# Allegro board design3 - Copy.brd
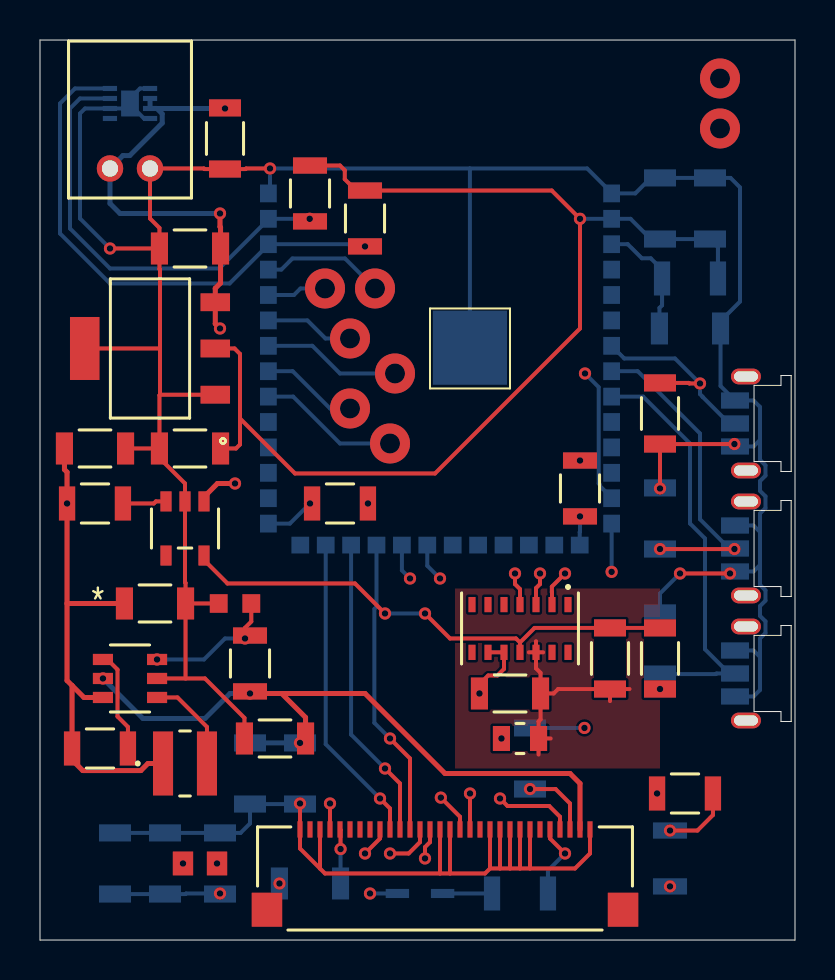
[diagram p0: board, top side]
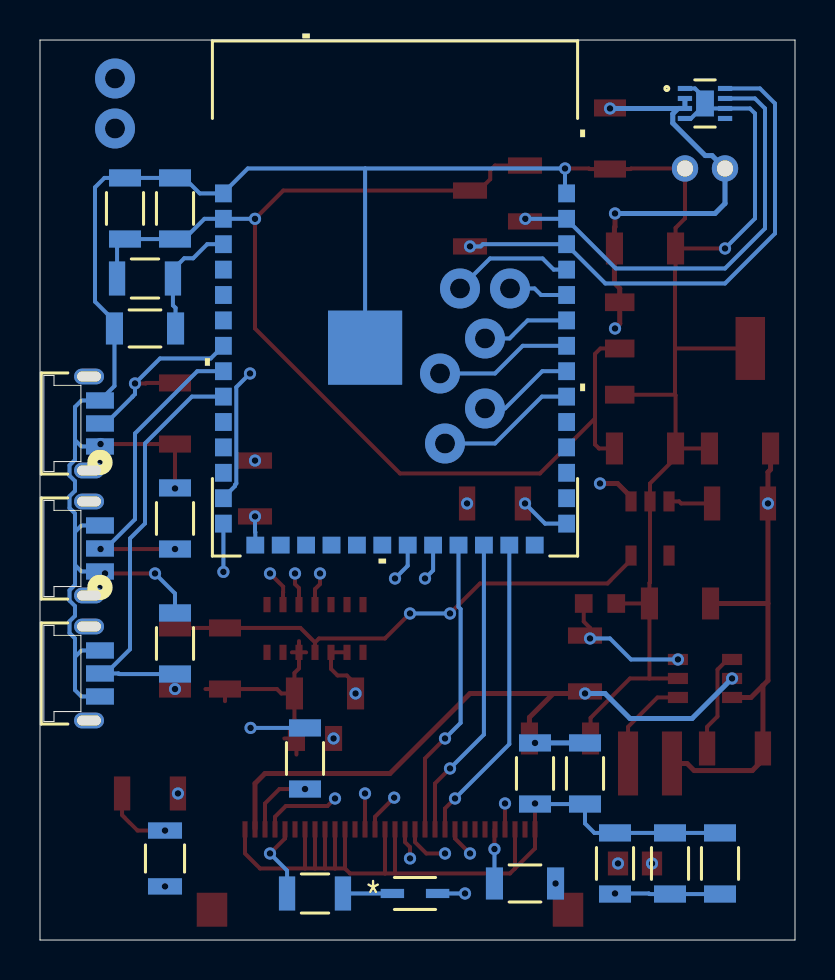
[diagram p1: board, bottom side, seen from below]

Outline 37.75 x 45 mm; copper layers: TOP, SIGNAL1, SIGNAL2, BOTTOM. Coordinates in mm from the lower left corner of the outline.
Outline path: 0,45 0,0 37.75,0 37.75,45 0,45

## Design rules (mm)
constraint set DEFAULT: pair gap 0.2
nets with their own width: min track width 0.25; nets 3.7V LI-PO 13V

## Placement (name value [footprint] x y rotation side)
C1  10uF  [CAP_CL31_SAM]  7.5 34.58 0 top
C2  10uF  [CAP_CL31_SAM]  7.5 24.58 0 top
C3  10uF  [CAP_CL31_SAM]  31 36.58 270 bottom
C4  0.1uF  [CAP_CL31_SAM]  33.5 36.58 270 bottom
C5  0.1uF  [CAP_CL31_SAM]  32.5 30.58 180 bottom
C6  10uF  [CAP_CL31_SAM]  23.5 12.33 180 top
C7  10uF  [CAP_CL31_SAM]  28.5 14.08 90 top
C8  0.01uF  [CAP_CL21_SAM]  24 10.08 180 top
C9  10uF  [CAP_CL31_SAM]  9.25 40.08 90 top
C10  10uF  [CAP_CL31_SAM]  5.75 16.83 180 top
C11  22uF  [CAP_CL31_SAM]  11.75 10.08 0 top
C12  10uF  [CAP_CL31_SAM]  10.5 8.33 90 bottom
C13  4.7uF  [CAP_CL31_SAM]  24.5 9.08 90 bottom
C14  1uF  [CAP_CL31_SAM]  9 3.83 90 bottom
C15  0.1uF  [CAP_CL31_SAM]  13 8.33 90 bottom
C16  1uF  [CAP_CL31_SAM]  13.5 2.83 0 bottom
C17  0.1uF  [CAP_CL31_SAM]  6.25 3.83 270 bottom
C18  4.7uF  [CAP_CL31_SAM]  3.75 3.83 90 bottom
C19  0.1uF  [CAP_CL31_SAM]  31 21.08 270 bottom
C20  0.1uF  [CAP_CL31_SAM]  31 26.33 90 top
C21  0.1uF  [CAP_CL31_SAM]  31 14.83 270 bottom
C22  1uF  [CAP_CL31_SAM]  2.75 24.58 0 top
C23  1uF  [CAP_CL31_SAM]  31 14.08 270 top
D1  1N4148WX-TP  [CR_SOD323_MCC]  19 2.33 180 bottom
J1  S2B-PH-K-S  [CONN_S2B-PH-K-S_JST]  5.5 38.58 180 top
J2  XF2M-3015-1A  [CON30_1X30_DRB_XF2C_TYC]  20.25 3.08 180 top
L1  22uH  [IND_WE-TPC_SMT_2828_WRE]  7.25 8.83 0 top
R1  10k  [RES_RC1206_YAG]  27 22.58 90 top
R2  10k  [RES_RC1206_YAG]  15 21.83 180 top
R3  10k  [RES_RC1206_YAG]  32.5 33.08 180 bottom
R4  10k  [RES_RC1206_YAG]  2.75 21.83 0 top
R5  1k  [RES_RC1206_YAG]  13.5 37.33 270 top
R6  1k  [RES_RC1206_YAG]  16.25 36.08 270 top
R9  10k  [RES_RC1206_YAG]  31.5 4.08 270 bottom
R10  10k  [RES_RC1206_YAG]  32.25 7.33 180 top
R11  10k  [RES_RC1206_YAG]  3 9.58 180 top
R12  10k 0.1%  [RES_RC1206_YAG]  10.5 13.83 90 top
R13  156 0.1%  [RESC1608X55N]  9.75 16.83 180 top
R14  50 0.1% 0.4W  [RES_RC1206_YAG]  24 2.33 180 bottom
R15  560k 1%  [RC0805N_YAG]  8 3.83 180 top
SW1  TL4105AF160QG  [TL4105AF160QG_EWI]  36.25 25.83 270 bottom
SW2  TL4105AF160QG  [TL4105AF160QG_EWI]  36.25 19.58 270 bottom
SW3  TL4105AF160QG  [TL4105AF160QG_EWI]  36.25 13.33 270 bottom
U1  ESP32-S3-WROOM-1-N8  [ESP32-S3-WROOM-1-N8_EXP]  20 32.08 180 bottom
U2  SPX1117M3-L-3-3/TR  [SOT223-3_MXL]  5.5 29.58 90 top
U3  MAX30102EFD+T  [21-1048_F143A51_MXM]  24 15.58 270 top
U4  AP2112K-1.8TRG1  [AP2112K-1P8TRG1_DIO]  7.25 20.58 270 top
U5  MAX17048G+T10  [21-0168E_T822-3_MXM]  4.5 41.83 180 bottom
U6  AP3036BKTR-G1  [SOIC6_AP3036BKTR-G1_DIO]  4.5 13.08 0 top

## Library data of the parts
C1-C5 C7-C20 C22 C23 = C
C6 C21 = C: User Part Number: PN; Tolerance: TOL
D1 = BAS16/SOT_0
J1 = SIPSOC-3_2
J2 = SIPSOC-32_3
L1 = L
R1 R3-R6 R9 R11-R14 = R
R2 R10 R15 = R: User Part Number: PN; Tolerance: TOL
SW1-SW3 = TL4105AF160QG
U1 = ESP32-S3-WROOM-1-N8
U2 = CSLSOC-4_3
U3 = DIPSOC-7x2_0
U4 = DIPSOC-3x2_0
U5 = ZIFSOC-7x2_0
U6 = DIPSOC-3x2_4

## Footprints (pads in the part's own frame, mm; a bottom-side part is the same pattern mirrored in y, then rotated)
21-0168E_T822-3_MXM
  rect 0.711x0.254 smd: 1(-1.003,0.75) 2(-1.003,0.25) 3(-1.003,-0.25) 4(-1.003,-0.75) 5(1.003,-0.75) 6(1.003,-0.25) 7(1.003,0.25) 8(1.003,0.75)
  rect 0.889x1.295 smd: 9(0,0)
21-1048_F143A51_MXM
  rect 0.762x0.356 smd: 1(-1.194,2.4) 2(-1.194,1.6) 3(-1.194,0.8) 4(-1.194,0) 5(-1.194,-0.8) 6(-1.194,-1.6) 7(-1.194,-2.4) 8(1.194,-2.4) 9(1.194,-1.6) 10(1.194,-0.8) 11(1.194,0) 12(1.194,0.8) 13(1.194,1.6) 14(1.194,2.4)
AP2112K-1P8TRG1_DIO
  rect 1.005x0.559 smd: 1(-1.353,0.95) 2(-1.353,0) 3(-1.353,-0.95) 4(1.353,-0.95) 5(1.353,0.95)
CAP_CL21_SAM
  rect 0.856x1.25 smd: 1(-0.928,0) 2(0.928,0)
CAP_CL31_SAM
  rect 0.856x1.6 smd: 1(-1.528,0) 2(1.528,0)
CON30_1X30_DRB_XF2C_TYC
  rect 1.524x1.702 smd: (-8.903,1.562) (8.903,1.562)
  rect 0.254x0.813 smd: 1(-7.25,-2.451) 2(-6.75,-2.451) 3(-6.25,-2.451) 4(-5.75,-2.451) 5(-5.25,-2.451) 6(-4.75,-2.451) 7(-4.25,-2.451) 8(-3.75,-2.451) 9(-3.25,-2.451) 10(-2.75,-2.451) 11(-2.25,-2.451) 12(-1.75,-2.451) 13(-1.25,-2.451) 14(-0.75,-2.451) 15(-0.25,-2.451) 16(0.25,-2.451) 17(0.75,-2.451) 18(1.25,-2.451) 19(1.75,-2.451) 20(2.25,-2.451) 21(2.75,-2.451) 22(3.25,-2.451) 23(3.75,-2.451) 24(4.25,-2.451) 25(4.75,-2.451) 26(5.25,-2.451) 27(5.75,-2.451) 28(6.25,-2.451) 29(6.75,-2.451) 30(7.25,-2.451)
CONN_S2B-PH-K-S_JST
  round 1.321 hole 0.813: 1(0,0) 2(2,0)
CR_SOD323_MCC
  rect 1.168x0.457 smd: 1(-1.13,0) 2(1.13,0)
ESP32-S3-WROOM-1-N8_EXP
  rect 0.838x0.889 smd: 1(-8.581,5.254) 2(-8.581,3.984) 3(-8.581,2.714) 4(-8.581,1.444) 5(-8.581,0.174) 6(-8.581,-1.096) 7(-8.581,-2.366) 8(-8.581,-3.636) 9(-8.581,-4.906) 10(-8.581,-6.176) 11(-8.581,-7.446) 12(-8.581,-8.716) 13(-8.581,-9.986) 14(-8.581,-11.256) 27(8.581,-11.256) 28(8.581,-9.986) 29(8.581,-8.716) 30(8.581,-7.446) 31(8.581,-6.176) 32(8.581,-4.906) 33(8.581,-3.636) 34(8.581,-2.366) 35(8.581,-1.096) 36(8.581,0.174) 37(8.581,1.444) 38(8.581,2.714) 39(8.581,3.984) 40(8.581,5.254)
  rect 0.889x0.838 smd: 15(-6.985,-12.331) 16(-5.715,-12.331) 17(-4.445,-12.331) 18(-3.175,-12.331) 19(-1.905,-12.331) 20(-0.635,-12.331) 21(0.635,-12.331) 22(1.905,-12.331) 23(3.175,-12.331) 24(4.445,-12.331) 25(5.715,-12.331) 26(6.985,-12.331)
  rect 3.708x3.708 smd: 41(-1.496,-2.461)
IND_WE-TPC_SMT_2828_WRE
  rect 1.003x3.2 smd: 1(-1.099,0) 2(1.099,0)
RC0805N_YAG
  rect 1.016x1.194 smd: 1(-0.851,0) 2(0.851,0)
RES_RC1206_YAG
  rect 0.813x1.702 smd: 1(-1.397,0) 2(1.397,0)
RESC1608X55N
  rect 0.89x0.93 smd: 1(-0.814,0) 2(0.814,0)
SOIC6_AP3036BKTR-G1_DIO
  rect 1.005x0.559 smd: 1(-1.353,0.95) 2(-1.353,0) 3(-1.353,-0.95) 4(1.353,-0.95) 5(1.353,0) 6(1.353,0.95)
SOT223-3_MXL
  rect 0.889x1.473 smd: 1(-2.311,-3.264) 2(0,-3.264) 3(2.311,-3.264)
  rect 3.15x1.473 smd: 4(0,3.264)
TL4105AF160QG_EWI
  round 0.406 hole 0.406 unplated: (-2.349,0.61) (-2.349,1.295) (2.349,0.61) (2.349,1.295)
  oval 0.787x1.499 hole 0.5x1.2: (-2.349,0.953) (2.349,0.953)
  rect 0.813x1.397 smd: 1(-1.149,1.499) 2(0,1.499) 3(1.149,1.499)

## Nets
1.8V: C7.2 C23.1 U3.11 U4.5
3.3V: C2.2 C3.2 C4.2 C6.2 C14.1 C17.2 C18.1 J2.4 J2.27 R3.1 R5.1 R6.1 U1.2 U2.2 U3.9 U3.10
3.7V LI-PO: C1.2 C9.2 C10.2 C22.1 J1.2 L1.1 R4.1 R11.2 U2.3 U4.1 U5.2 U5.3 U6.3
13V: C11.2 C12.2 C15.2 J2.2 R12.1 U6.2
AGND: C6.1 C7.1 C8.1 U3.12
GND: C1.1 C2.1 C3.1 C4.1 C5.1 C8.2 C9.1 C10.1 C11.1 C12.1 C13.2 C14.2 C15.1 C16.1 C17.1 C18.2 C19.1 C20.1 C21.1 C22.2 C23.2 D1.2(CATHODE) J1.1 J2.1 J2.7 J2.8 J2.9 J2.10 J2.11 J2.15 J2.16 J2.28 J2.30 R1.2 R2.1 R9.1 R10.1 R13.2 R15.2 SW1.1 SW1.3 SW2.1 SW2.3 SW3.1 SW3.3 U1.1 U1.40 U1.41 U2.1 U2.4 U3.4 U4.2 U5.1 U5.4 U5.6 U5.9 U6.5
BUTTON_1: C20.2 SW1.2 U1.7
BUTTON_2: C19.2 SW2.2 U1.8
BUTTON_3: C21.2 SW3.2 U1.9
DISP_CS: J2.19 U1.23
DISP_DC: J2.20 U1.24
DISP_MOSI: J2.13 U1.21
DISP_RES: J2.21 U1.25
DISP_SCK: J2.14 U1.22
ESP32_EN: C5.2 R3.2 U1.3
I2C_SCL: R5.2 U1.39 U3.2 U5.7
I2C_SDA: R6.2 U1.38 U3.3 U5.8
RX: U1.36
TCK: U1.32
TDI: U1.34
TDO: U1.33
TMS: U1.35
TX: U1.37(TXD0)
USB D+: U1.14
USB D-: U1.13
N00421: R2.2 U1.27
N01223: R1.1 U1.15
N04908: R4.2 U4.3
N15026: J2.18 R9.2
N15734: J2.17 R10.2
N18724: L1.2 U6.4
N20621: R12.2 R13.1 U6.6
N22987: C13.1 J2.3
N26816: J2.5 R14.1
N27245: J2.22 R15.1
N27840: C16.2 J2.26
N158330: R11.1 U6.1
N266210: D1.1 R14.2

Pads without a net: J2 6 12 23 24 25 29; U1 4 5 6 10 11 12 16 17 18 19 20 26 28 29 30 31; U3 1 5 6 7 8 13 14; U4 4; U5 5

## Via types
v1: diameter 0.61, hole 0.33, TOP to BOTTOM, 61 vias
v2: diameter 2, hole 1, TOP to BOTTOM, 8 vias

## Routing (per net, layer and track width the routed paths; a pad name or vN(x,y) marks a point on that pad's centre or on a via; arc(x,y) is an arc through that point)
1.8V: length 25.5
  TOP w0.2: v1(19.25,16.33) 20.5,15.08 23.8,15.08 24,14.88 ; v1(17.25,16.33) 15.75,17.83 9.37,17.83 8.2,19 U4.5 ; C23.1 C7.2 24.73,15.6 24,14.88 ; U3.11 24,14.88
  BOTTOM w0.2: v1(17.25,16.33) v1(19.25,16.33)
3.3V: length 100.3
  TOP w0.2: v1(21.97,12.33) 21.97,12.79 22.41,13.23 22.87,13.23 23.2,13.55 U3.10 U3.9 ; J2.4 26,6.16 25.46,6.7 23.38,6.7 v1(23,7.08) ; 10,26.08 10,29.3 9.73,29.58 U2.2 ; 10,26.08 12.75,23.33 19.75,23.33 27,30.58 v1(27,36.06) 25.59,37.47 R6.1 15.81,37.47 15.24,38.04 15.24,38.48 15,38.72 R5.1 ; 10,26.08 10,24.78 9.8,24.58 C2.2 ; J2.27 v1(14.5,6.83)
  SIGNAL1 w0.2: v1(14.5,6.83) 15.5,6.83 16,6.33 22.25,6.33 v1(23,7.08)
  SIGNAL2 w0.2: v1(9,2.33) 10,2.33 v1(14.5,6.83) 14.5,11.08 15.75,12.33 v1(21.97,12.33)
  BOTTOM w0.2: C18.1 C17.2 7.28,2.3 7.3,2.33 v1(9,2.33) ; v1(27,36.06) U1.2 29.53,36.06 30.54,35.05 C3.2 C4.2 33.9,34.65 R3.1
3.7V LI-PO: length 66.6
  TOP w0.25: U6.3 2.2,12.13 1.6,12.72 ; U4.1 8.2,22.15 8.87,22.83 v1(9.75,22.83) ; L1.1 5.4,8.83 5.04,8.47 2.14,8.47 1.6,9.01 R11.2 1.6,12.72 ; C10.2 1.35,16.83 ; 1.35,16.83 v1(1.35,21.83) 1.35,23.39 1.22,23.52 C22.1 ; 1.35,16.83 1.35,12.97 1.6,12.72 ; v1(9,30.58) 8.76,30.81 U2.3 8.76,32.58 9.03,32.85 C1.2 9.03,35.63 9,35.66 v1(9,36.33)
  SIGNAL1 w0.25: v1(9,30.58) 10.14,29.43 10.14,23.22 v1(9.75,22.83) 3.75,22.83 2.75,21.83 v1(1.35,21.83)
  BOTTOM w0.25: 5.84,41.58 v1(9.25,41.58) ; 5.84,41.58 6.11,41.31 6.11,40.84 4.49,39.22 4.15,39.22 J1.2 3.5,36.83 4,36.33 v1(9,36.33) ; 5.84,41.58 U5.3 U5.2
13V: length 34.6
  TOP w0.25: 12.08,12.33 16.25,12.33 20.25,8.33 26.5,8.33 27,7.83 J2.2 ; 12.08,12.33 13.28,11.13 C11.2 ; 12.08,12.33 v1(10.5,12.33)
  BOTTOM w0.25: v1(3.15,13.08) 5.15,11.08 8.25,11.08 9.5,12.33 v1(10.5,12.33) ; v1(13,9.85) C12.2
AGND: length 12.3
  TOP w0.2: 28.5,11.94 C7.1 ; C7.1 25.9,12.55 25.68,12.33 C6.1 ; C7.1 29.48,12.55 ; C8.1 24.93,10.93 25.03,11.03 C6.1 ; C8.1 25.53,10.08 ; C8.1 24.93,9.27 ; U3.12 25.16,14.38 ; U3.12 24.8,14.94 ; U3.12 24.44,14.38 ; U3.12 24.8,13.58 25.03,13.35 C6.1
GND: length 202.1
  TOP w0.2: 24,3.58 24.5,3.58 ; 24,3.58 J2.8 ; 24,3.58 23.5,3.58 ; 24.5,3.58 26.75,3.58 27.5,4.33 J2.1 ; 24.5,3.58 J2.7 ; 20.5,3.33 22.25,3.33 22.5,3.58 ; 20.5,3.33 J2.15 ; 20.5,3.33 20,3.33 ; 23.5,3.58 23,3.58 ; 23.5,3.58 J2.9 ; 23,3.58 J2.10 ; 23,3.58 22.5,3.58 ; 22.5,3.58 J2.11 ; C11.1 10.22,11.1 8.25,13.08 7.28,13.08 ; C10.1 7.28,13.08 ; C10.1 R13.2 ; C10.1 7.28,17.85 7.25,17.88 U4.2 7.25,22.83 5.97,24.1 C2.1 ; 7.28,13.08 U6.5 ; v1(31,22.58) C20.1 v1(34.72,24.8) ; v1(13,6.83) J2.30 13,4.58 14,3.58 ; v1(23.75,18.33) 23.75,17.79 24,17.54 U3.4 ; C2.1 C22.2 ; C2.1 5.97,27.24 6,27.26 ; 6,27.26 U2.1 ; 6,27.26 6,29.58 ; v1(3.5,34.58) C1.1 ; C1.1 5.97,35.6 5.5,36.08 J1.1 8.2,38.58 8.22,38.55 C9.1 10.28,38.55 10.3,38.58 v1(11.5,38.58) ; C1.1 5.97,33.55 6,33.52 6,29.58 ; R10.1 33.65,6.25 32.87,5.47 v1(31.5,5.47) ; 14,3.58 14.25,3.33 20,3.33 ; 14,3.58 J2.28 ; J2.16 20,3.33 ; 6,29.58 U2.4 ; v1(32,18.33) v1(34.5,18.33)
  SIGNAL2 w0.2: 4.66,38.58 J1.1 ; J1.1 5.5,37.74 ; J1.1 6.34,38.58 ; J1.1 5.5,39.41
  BOTTOM w0.2: U5.9 4.25,41.58 U5.6 2.25,41.58 2,41.33 2,36.08 v1(3.5,34.58) ; U5.9 4.5,42.08 5,42.58 U5.1 ; U5.9 4.5,41.78 5.2,41.08 U5.4 ; 21.5,38.58 U1.41 ; 21.5,38.58 27.36,38.58 28.58,37.36 U1.1 29.76,37.33 30.54,38.1 C3.1 C4.1 34.53,38.1 35,37.63 35,31.92 34.03,30.95 C5.1 34.03,27.7 SW1.1 35.68,26.98 36,26.65 36,25 ; 21.5,38.58 v1(11.5,38.58) 11.5,37.41 U1.40 ; SW3.1 35.68,14.48 36,14.15 ; 36,18.75 36,17.76 36.27,17.48 36.27,16.97 36,16.7 36,16.21 36.27,15.93 36.27,15.35 36,15.08 36,14.15 ; 36,18.75 36,20.4 ; 36,18.75 35.68,18.43 SW2.3 ; 36,25 36,24.01 36.27,23.73 36.27,23.22 36,22.95 36,22.46 36.27,22.18 36.27,21.6 36,21.33 36,20.4 ; 36,25 35.68,24.68 SW1.3 ; 36,14.15 36,12.5 35.68,12.18 SW3.3 ; 36,20.4 35.68,20.73 SW2.1 ; C21.1 31,17.33 v1(32,18.33) ; C15.1 C12.1 10.5,5.83 10.03,5.35 C14.2 C17.1 C18.2 ; D1.2 v1(16.5,2.33) ; C13.2 v1(27.22,10.6)
  vias: v1(7.15,3.83) v1(11.97,2.83) v1(16.4,21.83) v1(23.07,10.08) v1(27,23.97) v1(31,12.55)
BUTTON_1: length 10.1
  TOP w0.2: C20.2 32.44,27.85 32.47,27.83 v1(33,27.83)
  BOTTOM w0.2: U1.7 29.21,29.08 31.75,29.08 v1(33,27.83) 33,27.29 33.13,27.17 33.13,27.16 34.46,25.83 SW1.2
BUTTON_2: length 16.1
  TOP w0.2: v1(31,19.55) v1(34.72,19.55)
  BOTTOM w0.2: SW2.2 34.46,19.58 33,21.04 33,25.33 29.89,28.44 U1.8
BUTTON_3: length 21
  BOTTOM w0.2: 34.46,13.33 33.25,14.54 33.25,20.08 32.5,20.83 32.5,24.83 30.16,27.17 U1.9 ; 34.46,13.33 33.83,13.33 33.8,13.3 C21.2 ; 34.46,13.33 SW3.2
DISP_CS: length 15
  TOP w0.2: v1(17.5,10.08) 18.5,9.08 J2.19
  BOTTOM w0.2: U1.23 16.82,16.65 16.72,16.55 16.72,10.86 v1(17.5,10.08)
DISP_DC: length 15.2
  TOP w0.2: v1(17.25,8.58) 18,7.83 J2.20
  BOTTOM w0.2: v1(17.25,8.58) 15.56,10.27 U1.24
DISP_MOSI: length 15.1
  TOP w0.2: v1(21.5,7.33) J2.13
  SIGNAL1 w0.2: v1(20,18.08) 20,8.83 v1(21.5,7.33)
  BOTTOM w0.2: v1(20,18.08) 19.37,18.71 U1.21
DISP_RES: length 15.5
  TOP w0.2: J2.21 17.5,6.58 v1(17,7.08)
  BOTTOM w0.2: v1(17,7.08) 14.29,9.79 U1.25
DISP_SCK: length 15.4
  TOP w0.2: J2.14 21,6.16 v1(20.04,7.12)
  SIGNAL1 w0.2: v1(20.04,7.12) 19.5,7.66 19.5,8.33 18.5,9.33 v1(18.5,18.08)
  BOTTOM w0.2: v1(18.5,18.08) 18.1,18.48 U1.22
ESP32_EN: length 6
  BOTTOM w0.2: U1.3 29.39,34.79 30.09,34.09 30.54,34.09 31.1,33.52 R3.2 31.1,31.73 30.97,31.6 C5.2
I2C_SCL: length 53.1
  TOP w0.2: U3.2 25.6,17.38 25.59,17.39 25.59,17.67 v1(26.25,18.33)
  SIGNAL2 w0.2: v1(13.48,36.06) 24.02,36.06 25.75,34.33 25.75,18.83 v1(26.25,18.33)
  BOTTOM w0.2: v1(13.48,36.06) U1.39 11.42,36.03 8.96,33.58 3.5,33.58 1.5,35.58 1.5,41.58 2,42.08 U5.7
I2C_SDA: length 52.3
  TOP w0.2: U3.3 24.8,17.59 25,17.79 v1(25,18.33)
  SIGNAL1 w0.2: v1(16.25,34.68) 23.4,34.68 25,33.08 v1(25,18.33)
  BOTTOM w0.2: U5.8 1.75,42.58 1,41.83 1,35.33 3.5,32.83 9.48,32.83 11.42,34.76 U1.38 15.61,34.79 15.72,34.68 v1(16.25,34.68)
RX: length 3
  BOTTOM w0.2: U1.36 12.7,32.25 13.02,32.58 v2(14.25,32.58)
TCK: length 7.1
  BOTTOM w0.2: U1.32 12.66,27.17 15,24.83 v2(17.5,24.83)
TDI: length 6.9
  BOTTOM w0.2: U1.34 13.62,29.71 15,28.33 v2(17.75,28.33)
TDO: length 4.9
  BOTTOM w0.2: v2(15.5,26.58) 14.5,26.58 12.64,28.44 U1.33
TMS: length 4.5
  BOTTOM w0.2: U1.35 13.37,30.98 14.27,30.08 v2(15.5,30.08)
TX: length 6.2
  BOTTOM w0.2: U1.37 12.07,33.52 12.62,34.08 15.25,34.08 v2(16.75,32.58)
USB D+: length 28.9
  SIGNAL2 w0.2: v1(28.58,18.41) 29.55,18.41 29.75,18.61 29.75,38.83 31.5,40.58 v2(34,40.58)
  BOTTOM w0.2: U1.14 v1(28.58,18.41)
USB D-: length 25.8
  SIGNAL2 w0.2: v1(27.25,28.33) 27.25,34.58 29.42,36.75 29.42,41 31.5,43.08 v2(34,43.08)
  BOTTOM w0.2: U1.13 28.58,22.12 28,22.7 28,22.76 27.93,22.82 27.93,27.64 v1(27.25,28.33)
N00421: length 2.5
  BOTTOM w0.2: v1(13.5,21.83) 12.49,20.82 U1.27
N01223: length 1.4
  BOTTOM w0.2: U1.15 26.99,20.39 27,20.41 v1(27,21.18)
N04908: length 2.2
  TOP w0.2: U4.3 5.79,21.93 5.69,21.83 R4.2
N15026: length 17.4
  TOP w0.2: J2.18 19,4.89 18.43,4.33 v1(17.5,4.33)
  SIGNAL2 w0.2: v1(17.5,4.33) 17.5,3.79 18.62,2.68 v1(31.5,2.68)
N15734: length 15
  TOP w0.2: J2.17 19.5,4.89 19.25,4.64 v1(19.25,4.08)
  SIGNAL2 w0.2: v1(30.85,7.33) 25.03,7.33 24.72,7.02 23.81,7.02 23.22,7.61 22.78,7.61 v1(19.25,4.08)
N18724: length 4.9
  TOP w0.2: U6.4 6.88,12.13 8.35,10.65 L1.2
N20621: length 6.7
  TOP w0.2: R13.1 10.56,15.92 10.25,15.61 v1(10.25,15.08)
  BOTTOM w0.2: v1(5.85,14.03) 8.2,14.03 9.25,15.08 v1(10.25,15.08)
N22987: length 3.6
  TOP w0.2: J2.3 26.5,6.83 25.78,7.55 v1(24.5,7.55)
N26816: length 3.9
  TOP w0.2: v1(26.25,4.33) 25.5,5.08 J2.5
  BOTTOM w0.2: v1(26.25,4.33) 25.4,3.47 R14.1
N27245: length 9.1
  TOP w0.2: v1(16.25,4.33) 17,5.08 J2.22
  SIGNAL1 w0.2: v1(16.25,4.33) 15.75,3.83 v1(8.85,3.83)
N27840: length 2.7
  TOP w0.2: J2.26 15.03,5.5 v1(15.03,4.55)
  BOTTOM w0.2: C16.2 v1(15.03,4.55)
N158330: length 5.1
  TOP w0.2: R11.1 4.4,10.65 3.88,11.18 3.88,13.52 3.37,14.03 U6.1
N266210: length 2.5
  BOTTOM w0.2: R14.2 D1.1

## Copper pours and planes (outline as drawn; the poured copper is in the pictures)
AGND on TOP: 20.75,17.58 20.75,8.58 31,8.58 31,17.58
GND on SIGNAL2: 0.5,44.58 0.5,0.58 37.25,0.58 37.25,44.58

## Text on the board
Package Geometry/Place Bound Top: RX | ESP-32 Smart Watch | Valenzuela T. | TMS | TDO | TCK | TDI | TX | V1 Rev. A | D- | D+
